# Altium PCB temp sense 2.0,uhh.PcbDoc (part 1 of 3)
Units mm, origin at the board's own origin, x right, y up, seen from the top; angles counter-clockwise.
Board outline 238.51 x 89.79 mm, 4 copper layers (Top Layer, Layer 1, Layer 2, Bottom Layer), stack 0.603 mm thick; 185 components, 160 nets, 943 pads, 253 vias.
Unrouted connection lines stored in the file: 15.
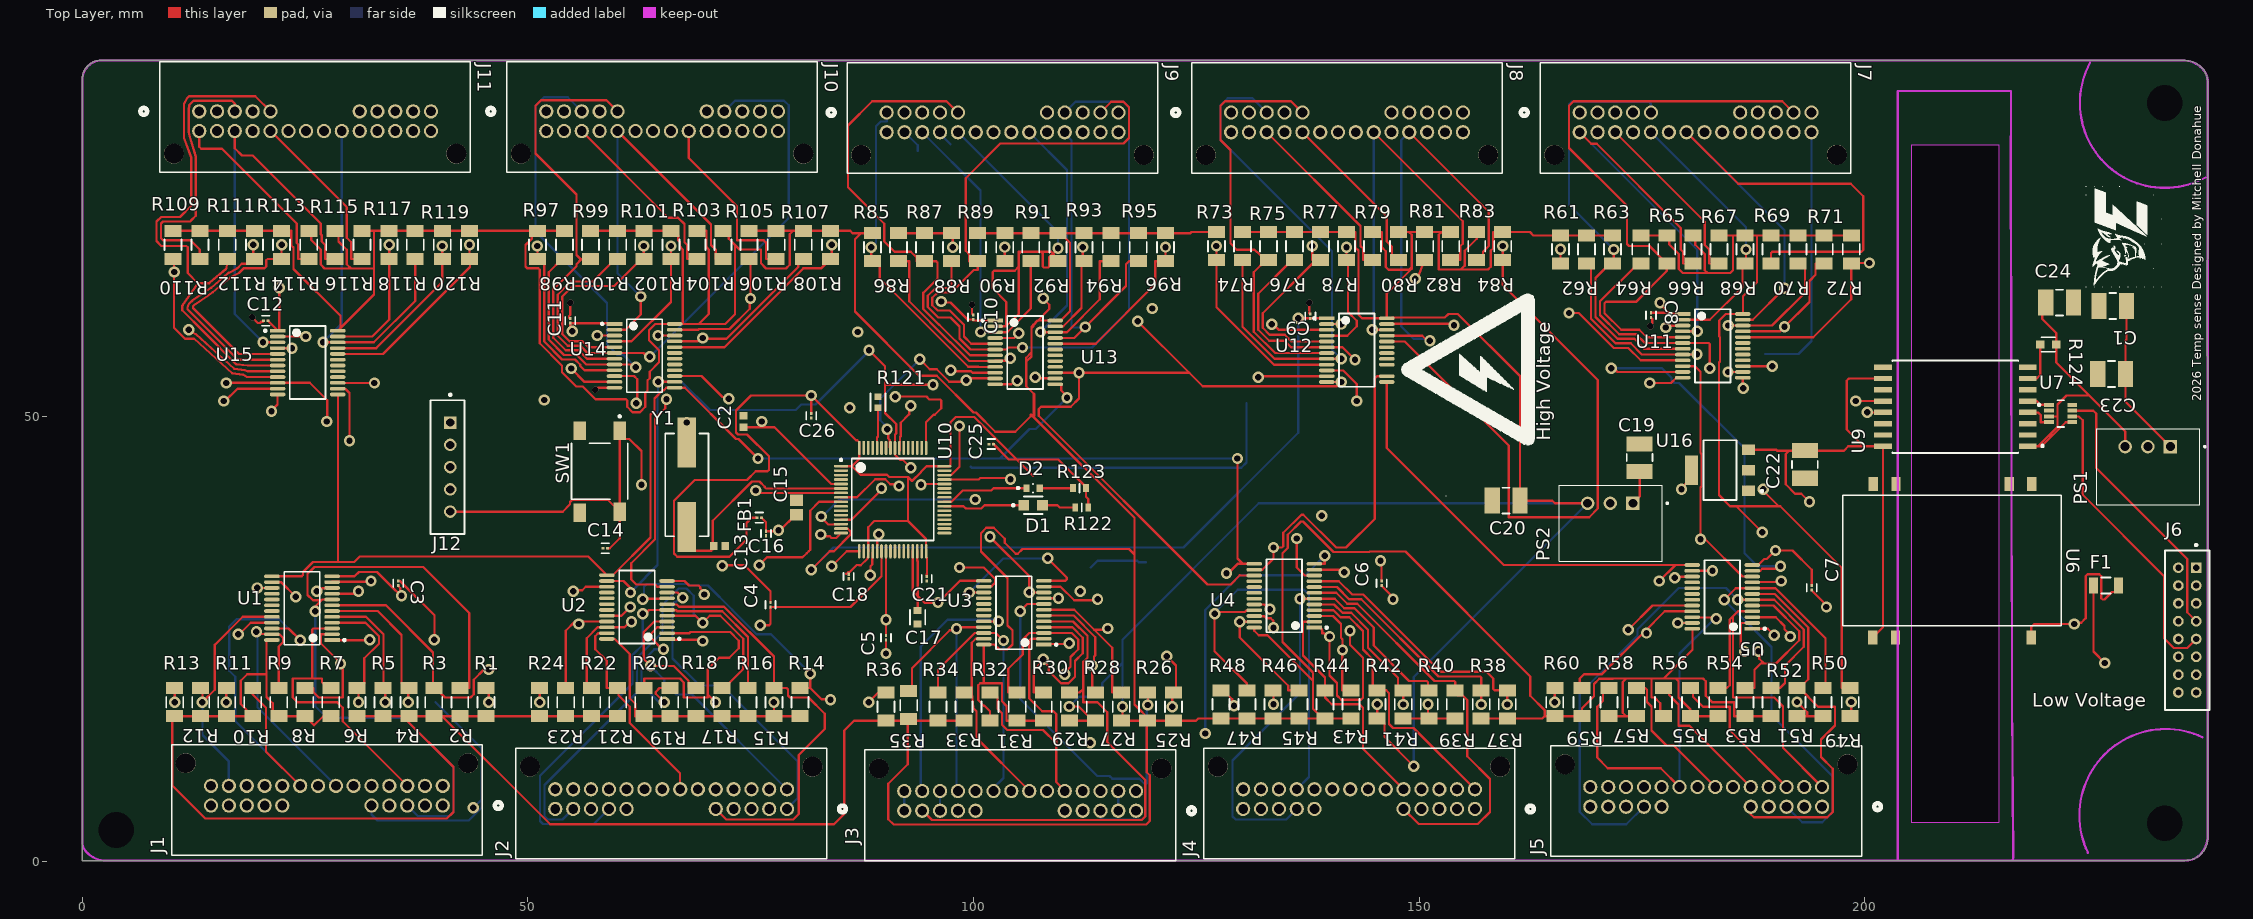
[diagram p0: Top Layer view]
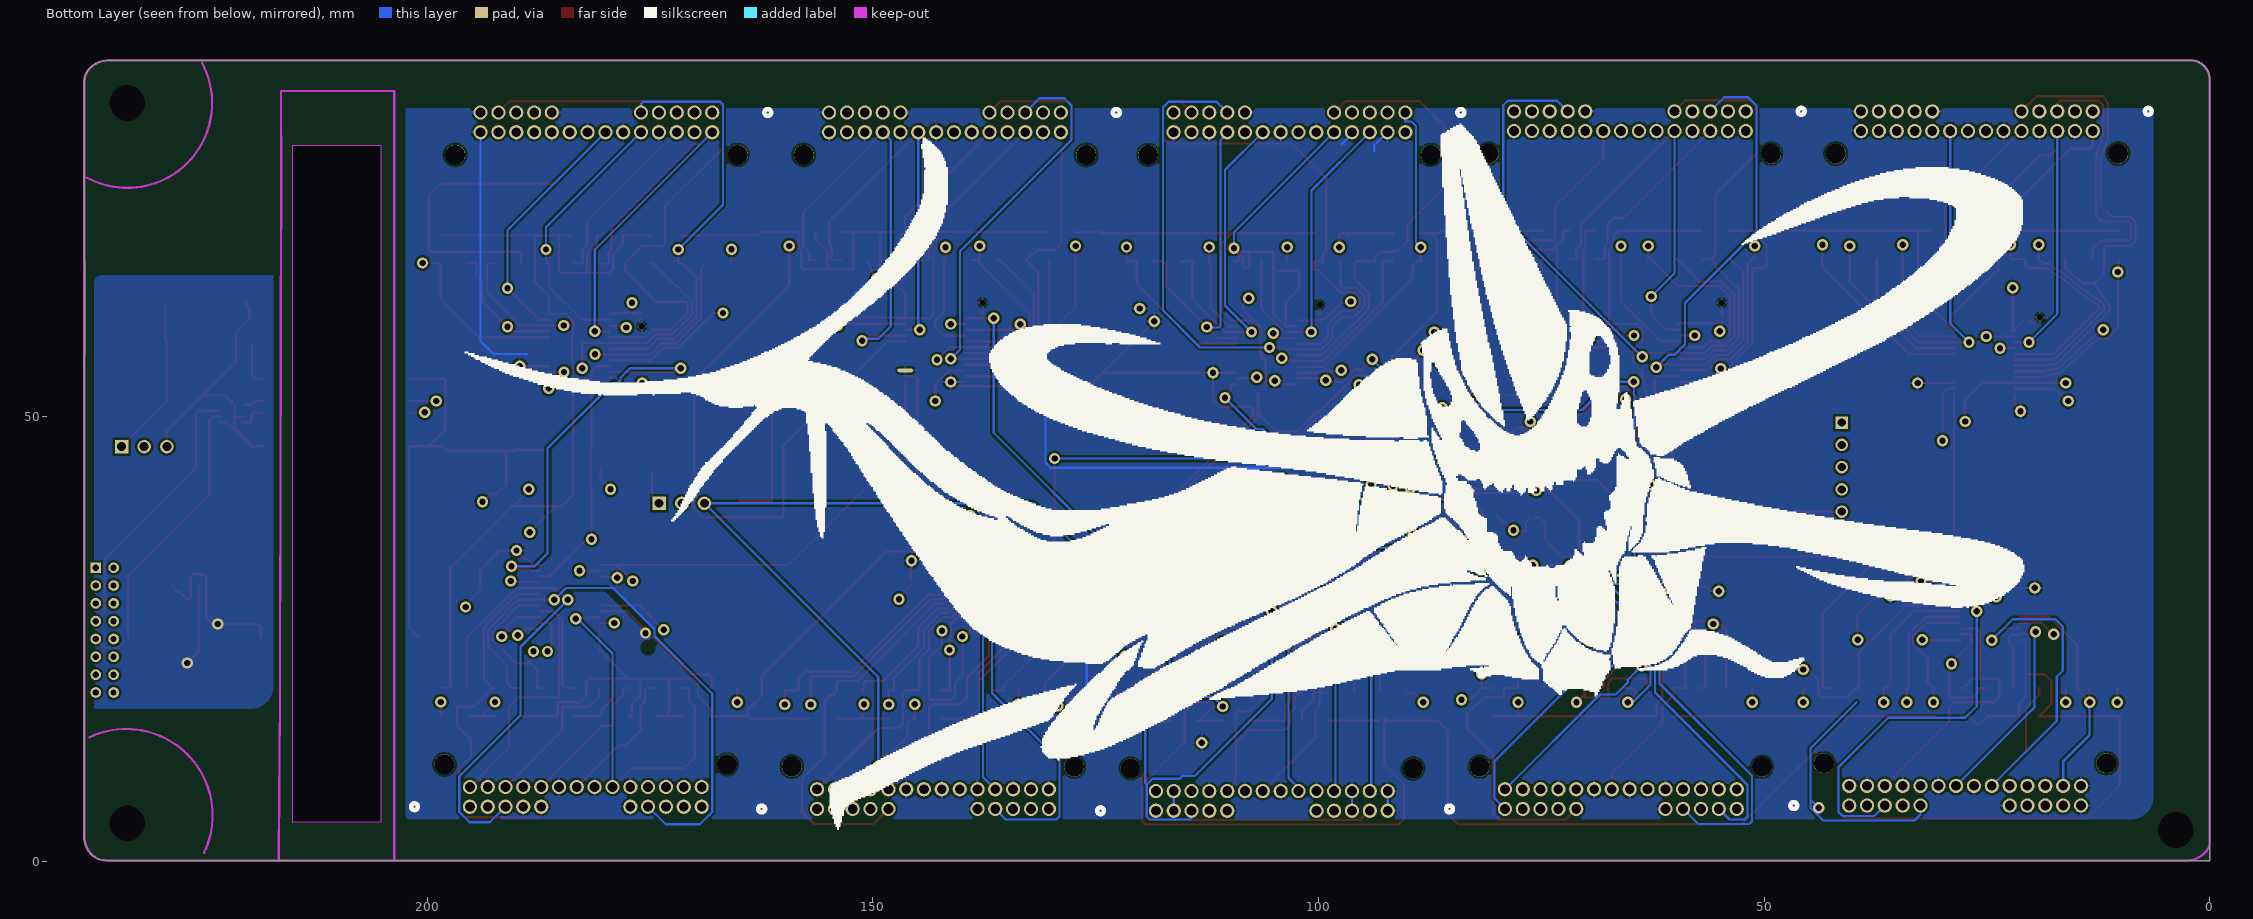
[diagram p1: Bottom Layer view, seen from below]
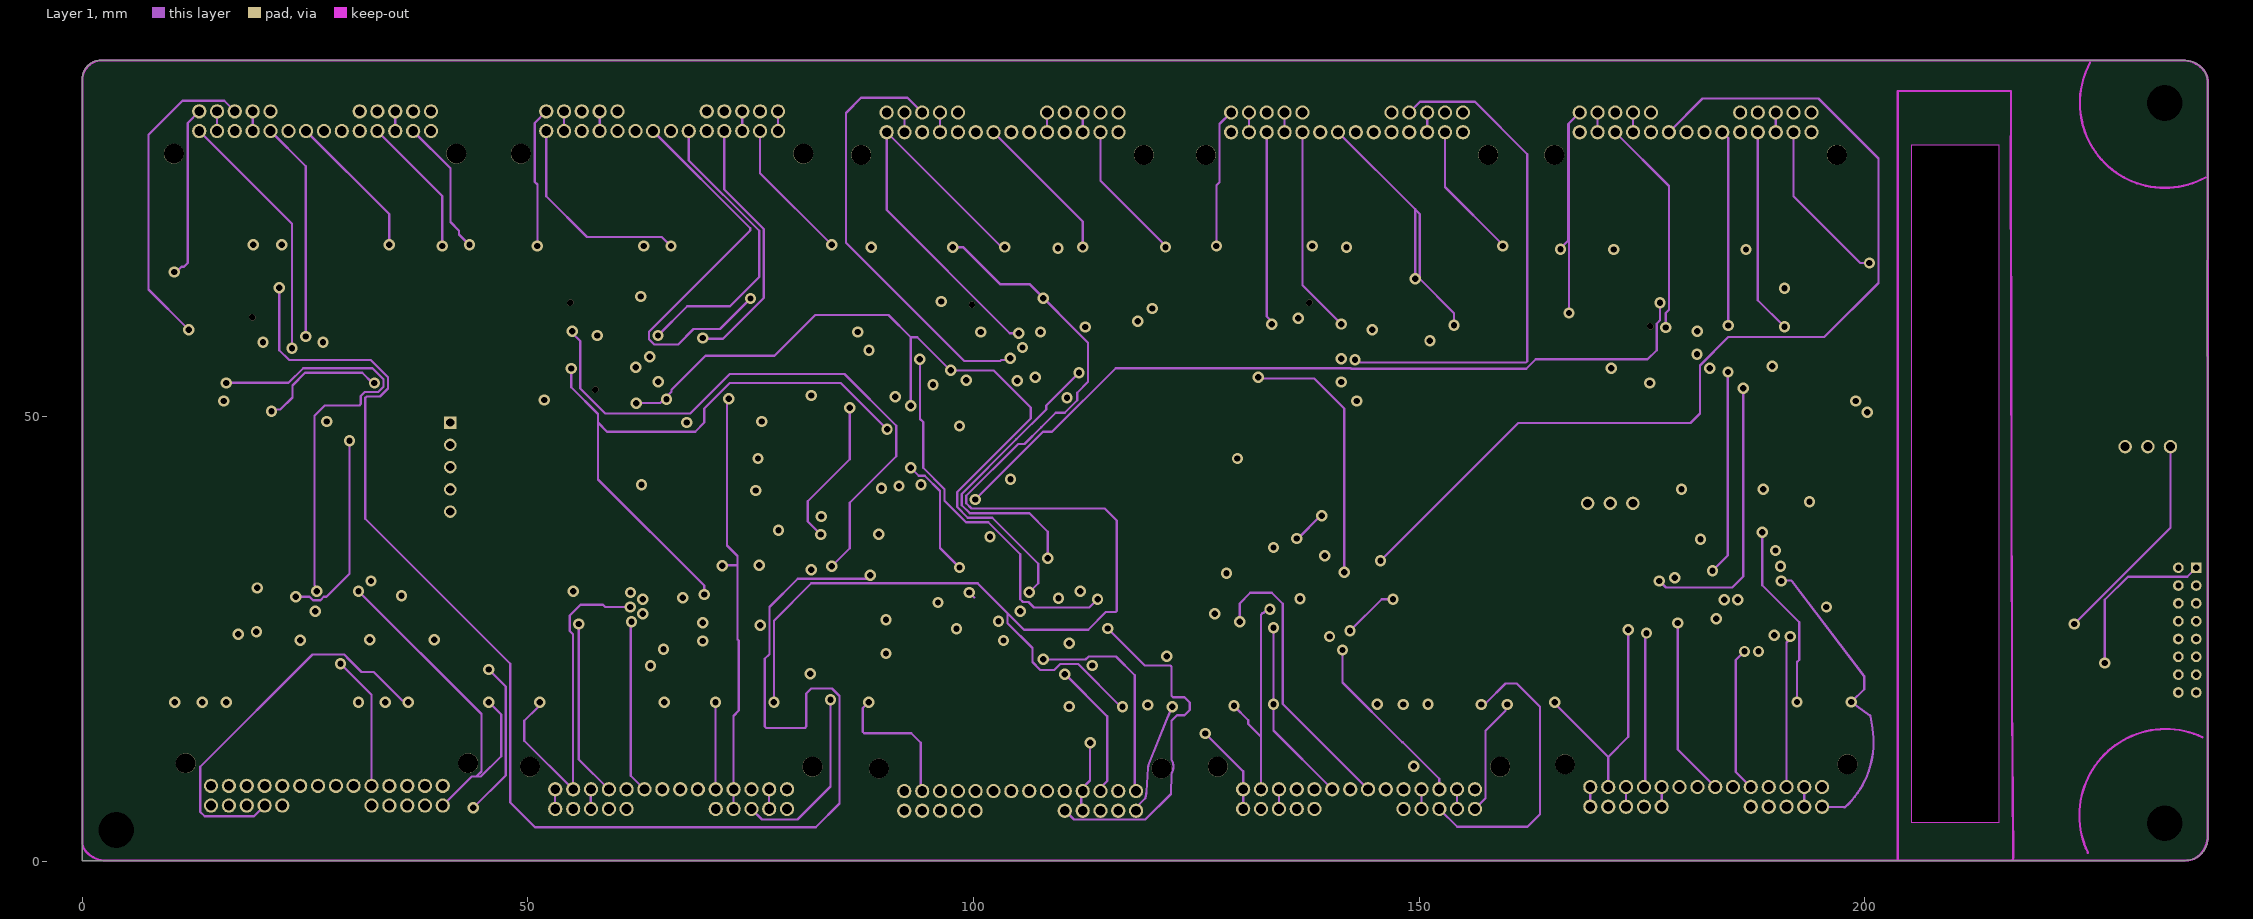
[diagram p2: Layer 1]
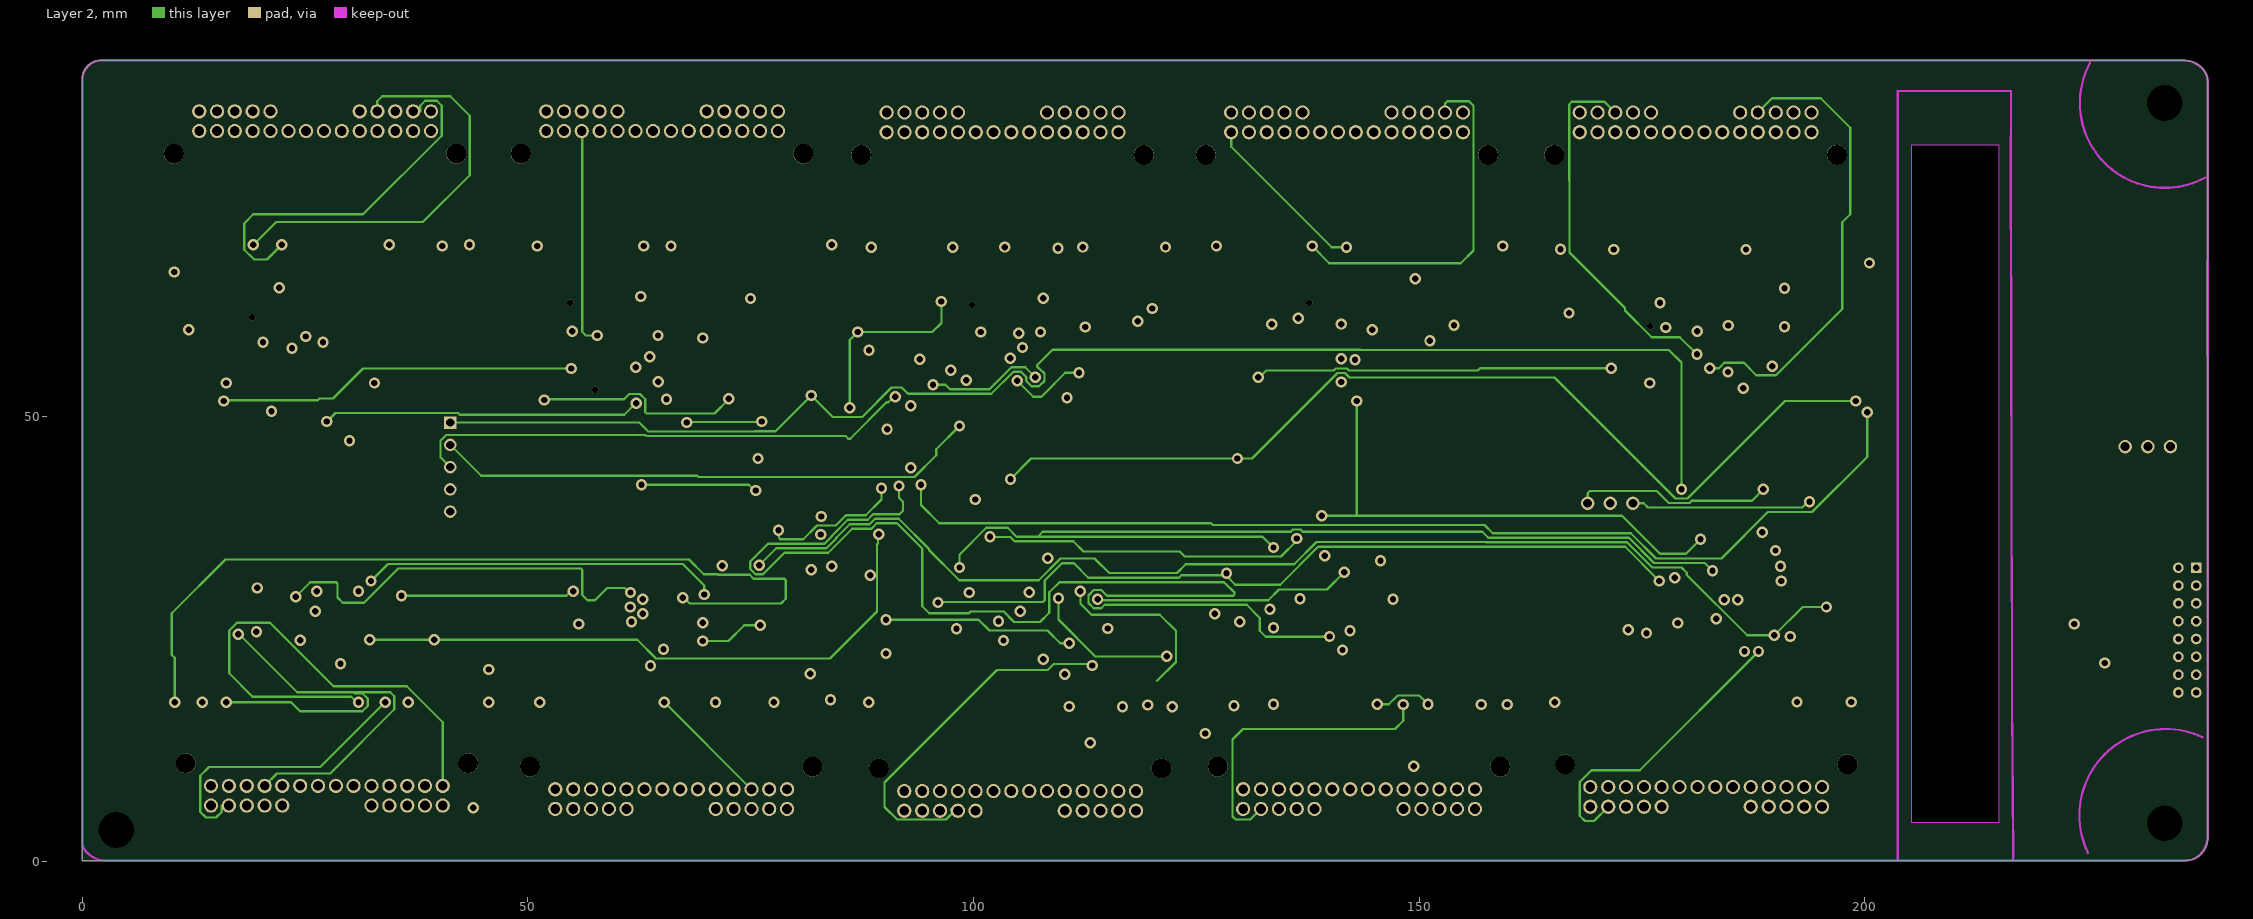
[diagram p3: Layer 2]
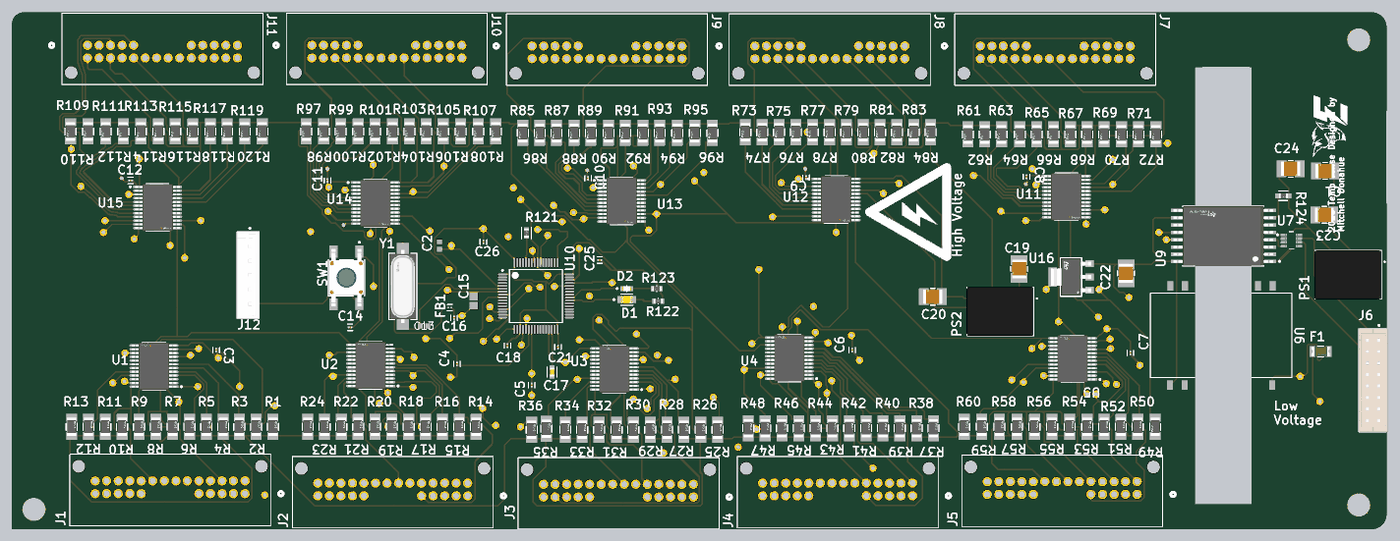
[diagram p6: 3D render of the assembled board from above, using the file's embedded part models]

## Layer stack, top to bottom
Top Solder: solder mask 0.0102, Solder Resist, Dk 3.5
Top Layer: signal copper 0.0356
Dielectric 2: prepreg 0.0711, PP-006, Dk 4.1
Layer 1: signal copper 0.035
Dielectric 1: dielectric 0.32, FR-4, Dk 4.8
Layer 2: signal copper 0.035
Dielectric 3: prepreg 0.0711, PP-006, Dk 4.1
Bottom Layer: signal copper 0.0356
Bottom Solder: solder mask 0.0102, Solder Resist, Dk 3.5

## Board outline
0,87.884 cw(c2.032,87.884) 2.032,89.916 235.966,89.916 cw(c235.966,87.376) 238.506,87.376 238.506,78.359 238.469,56.732 cw(c238.379,56.642) 238.506,56.642 238.506,2.667 cw(c235.966,2.667) 235.966,0.127 0,0.127
cut-out: 205.232,42.545 205.232,4.445 215.105,4.445 215.105,80.391 205.232,80.391 205.232,50.8

## Design rules (kind name [scope] priority, off if disabled: settings)
Clearance mcu_clearance [(InComponentClass('MCU') AND InComponent('U10'))] p1: gap=0.15 ignorepadtopadclearanceinfootprint=FALSE
Clearance [All] p2: gap=0.254 ignorepadtopadclearanceinfootprint=FALSE
PolygonConnect [All] p1: connectstyle=Relief reliefconductorwidth=0.254 reliefentries=4 polygonreliefangle="90 Angle" airgapwidth=0.254
RoutingVias [All] p1: holewidth=0.711 width=1.27 viastyle="Through Hole" minholewidth=0.711 minwidth=1.27 maxholewidth=0.711 maxwidth=1.27
SolderMaskExpansion [All] p1: expansion=0.102 istentingtop=FALSE
SupplyNets "Schematic Supply Nets_1" [InNet('GND')] p1: voltage=0.000
SupplyNets "Schematic Supply Nets" [InNet('GND')] p2: voltage=0.000
Width [All] p1: maxlimit=0.254 minlimit=0.254 preferedwidth=0.254
30 further rules are at their usual default settings.

## Classes and differential pairs
component class Power: C1 C22 C23 C24 F1 J6 PS1 R124 U6 U7 U9
component class "Mux side right": C8 C9 C10 C11 C12 J7 J8 J9 J10 J11 R61 R62 R63 R64 R65 R66 R67 R68 R69 R70 R71 R72 R73 R74 R75 R76 R77 R78 R79 R80 R81 R82 R83 R84 R85 R86 R87 R88 R89 R90 R91 R92 R93 R94 R95 R96 R97 R98 R99 R100 R101 R102 R103 R104 R105 R106 R107 R108 R109 R110 R111 R112 R113 R114 R115 R116 R117 R118 R119 R120 U11 U12 U13 U14 U15
component class "mux side left": C3 C4 C5 C6 C7 J1 J2 J3 J4 J5 R1 R2 R3 R4 R5 R6 R7 R8 R9 R10 R11 R12 R13 R14 R15 R16 R17 R18 R19 R20 R21 R22 R23 R24 R25 R26 R27 R28 R29 R30 R31 R32 R33 R34 R35 R36 R37 R38 R39 R40 R41 R42 R43 R44 R45 R46 R47 R48 R49 R50 R51 R52 R53 R54 R55 R56 R57 R58 R59 R60 U1 U2 U3 U4 U5
component class MCU: C2 C13 C14 C15 C16 C17 C18 C19 C20 C21 C25 C26 D1 D2 FB1 J12 PS2 R121 R122 R123 SW1 U10 U16 Y1

## Components (designator, comment, footprint, x,y, rotation, side; value= is the part's Value field where it differs from the comment)
C1 "1210ZC106KAT2A" FP-1210-L_3_3_0_4-W_2_5_0-IPC_A 227.838,62.357 r180 top
C2 "06035A300JAT2A" CAPC1608X90X35LL15T15 74.168,49.403 r90 top
C3 "GRM033R61A104KE15D" FP-GRM033-0_03-IPC_C#1 35.433,31.242 r270 top
C4 "GRM033R61A104KE15D" FP-GRM033-0_03-IPC_C#1 77.216,28.829 r90 top
C5 "GRM033R61A104KE15D" FP-GRM033-0_03-IPC_C#1 90.17,25.146 r270 top
C6 "GRM033R61A104KE15D" FP-GRM033-0_03-IPC_C#1 145.796,31.242 r90 top
C7 "GRM033R61A104KE15D" FP-GRM033-0_03-IPC_C#1 194.056,30.734 r90 top
C8 "GRM033R61A104KE15D" FP-GRM033-0_03-IPC_C#1 176.022,61.341 r270 top
C9 "GRM033R61A104KE15D" FP-GRM033-0_03-IPC_C#1 137.795,61.214 r90 top
C10 "GRM033R61A104KE15D" FP-GRM033-0_03-IPC_C#2 99.949,61.087 r90 top
C11 "GRM033R61A104KE15D" FP-GRM033-0_03-IPC_C#1 54.737,60.706 r90 top
C12 "GRM033R61A104KE15D" FP-GRM033-0_03-IPC_C#1 20.574,60.706 r180 top
C13 "06035A300JAT2A" CAPC1608X90X35LL15T15 71.501,35.433 r180 top
C14 "GRM033R61A104KE15D" FP-GRM033-0_03-IPC_C#1 58.674,35.179 r180 top
C15 "0805YD105MAT2A" CAPC2013X140X50NL20T25 80.137,39.751 r270 top
C16 "GRM033R61A104KE15D" FP-GRM033-0_03-IPC_C#1 76.708,36.83 r270 top
C17 "CC0603KPX5R7BB225" FP-CC0603-DA-MFG 93.726,27.432 r270 top value="2.2 uF"
C18 "GRM033R61A104KE15D" FP-GRM033-0_03-IPC_C#1 85.979,32.004 r270 top
C19 "1210ZC106KAT2A" FP-1210-L_3_3_0_4-W_2_5_0-IPC_A 174.752,45.339 r270 top
C20 "1210ZC106KAT2A" FP-1210-L_3_3_0_4-W_2_5_0-IPC_A 159.766,40.513 r180 top
C21 "RM033R61A104KE15D" FP-GRM033-0_03-IPC_C#1 94.742,31.75 r270 top
C22 "1210ZC106KAT2A" FP-1210-L_3_3_0_4-W_2_5_0-IPC_A 193.294,44.577 r90 top
C23 "1210ZC106KAT2A" FP-1210-L_3_3_0_4-W_2_5_0-IPC_A 227.711,54.737 r180 top
C24 "1210ZC106KAT2A" FP-1210-L_3_3_0_4-W_2_5_0-IPC_A 221.869,62.738 r0 top
C25 "GRM033R61A104KE15D" FP-GRM033-0_03-IPC_C#1 101.981,46.863 r180 top
C26 "GRM033R61A104KE15D" FP-GRM033-0_03-IPC_C#1 81.788,50.038 r270 top
D1 "APHCM2012SYCK-F01" FP-APHCM2012SYCK-F01-MFG 106.68,40.005 r0 top
D2 "APHD1608LZGCK" FP-APHD1608LZGCK-MFG 106.68,41.91 r0 top
F1 "1206L075/16WR" FP-1206L-MFG 227.076,30.988 r0 top value=0.09-0.29Ω
FB1 "BLM03BB750SZ1D" FP-BLM03-0_03-d0_3-IPC_C 75.946,38.608 r0 top
J1 "348250240" CONN_SD-34825-001_24_MOL 40.437,6.299 r180 top
J2 "348250240" CONN_SD-34825-001_24_MOL 79.07,5.918 r180 top
J3 "348250240" CONN_SD-34825-001_24_MOL 118.237,5.715 r180 top
J4 "348250240" CONN_SD-34825-001_24_MOL 156.261,5.918 r180 top
J5 "348250240" CONN_SD-34825-001_24_MOL 195.224,6.172 r180 top
J6 "B16B-PHDSS(LF)(SN)" FP-B16B-PHDSS_LF_SN-MFG 236.204,25.987 r90 top
J7 "348250240" CONN_SD-34825-001_24_MOL 168.021,84.074 r0 top
J8 "348250240" CONN_SD-34825-001_24_MOL 128.905,84.074 r0 top
J9 "348250240" CONN_SD-34825-001_24_MOL 90.246,84.074 r0 top
J10 "348250240" CONN_SD-34825-001_24_MOL 52.045,84.201 r0 top
J11 "348250240" CONN_SD-34825-001_24_MOL 13.106,84.201 r0 top
J12 "B5B-EH-A(LF)(SN)" FP-B5B-EH-A_LF_SN-MFG 40.975,44.283 r270 top
PS1 "R-78E3.3-0.5" CONV_R-78E3.3-0.5 231.775,44.323 r180 top
PS2 "R-78E3.3-0.5" CONV_R-78E3.3-0.5 171.45,37.973 r180 top
R1 "RN73R2BTTD3001B25" FP-RN73R2B-IPC_A 45.275,17.907 r90 top
R2 "RN73R2BTTD3001B25" FP-RN73R2B-IPC_A 42.354,17.907 r90 top
R3 "RN73R2BTTD3001B25" FP-RN73R2B-IPC_A 39.433,17.907 r90 top
R4 "RN73R2BTTD3001B25" FP-RN73R2B-IPC_A 36.639,17.907 r90 top
R5 "RN73R2BTTD3001B25" FP-RN73R2B-IPC_A 33.718,17.907 r90 top
R6 "RN73R2BTTD3001B25" FP-RN73R2B-IPC_A 30.797,17.907 r90 top
R7 "RN73R2BTTD3001B25" FP-RN73R2B-IPC_A 27.876,17.907 r90 top
R8 "RN73R2BTTD3001B25" FP-RN73R2B-IPC_A 24.955,17.907 r90 top
R9 "RN73R2BTTD3001B25" FP-RN73R2B-IPC_A 22.034,17.907 r90 top
R10 "RN73R2BTTD3001B25" FP-RN73R2B-IPC_A 19.113,17.907 r90 top
R11 "RN73R2BTTD3001B25" FP-RN73R2B-IPC_A 16.192,17.907 r90 top
R12 "RN73R2BTTD3001B25" FP-RN73R2B-IPC_A 13.271,17.907 r90 top
R13 "RN73R2BTTD3001B25" FP-RN73R2B-IPC_A 10.35,17.907 r90 top
R14 "RN73R2BTTD3001B25" FP-RN73R2B-IPC_A 80.518,17.907 r90 top
R15 "RN73R2BTTD3001B25" FP-RN73R2B-IPC_A 77.597,17.907 r90 top
R16 "RN73R2BTTD3001B25" FP-RN73R2B-IPC_A 74.676,17.907 r90 top
R17 "RN73R2BTTD3001B25" FP-RN73R2B-IPC_A 71.755,17.907 r90 top
R18 "RN73R2BTTD3001B25" FP-RN73R2B-IPC_A 68.834,17.907 r90 top
R19 "RN73R2BTTD3001B25" FP-RN73R2B-IPC_A 65.913,17.907 r90 top
R20 "RN73R2BTTD3001B25" FP-RN73R2B-IPC_A 62.992,17.907 r90 top
R21 "RN73R2BTTD3001B25" FP-RN73R2B-IPC_A 60.071,17.907 r90 top
R22 "RN73R2BTTD3001B25" FP-RN73R2B-IPC_A 57.15,17.907 r90 top
R23 "RN73R2BTTD3001B25" FP-RN73R2B-IPC_A 54.229,17.907 r90 top
R24 "RN73R2BTTD3001B25" FP-RN73R2B-IPC_A 51.308,17.907 r90 top
R25 "RN73R2BTTD3001B25" FP-RN73R2B-IPC_A 122.428,17.399 r90 top
R26 "RN73R2BTTD3001B25" FP-RN73R2B-IPC_A 119.507,17.399 r90 top
R27 "RN73R2BTTD3001B25" FP-RN73R2B-IPC_A 116.586,17.399 r90 top
R28 "RN73R2BTTD3001B25" FP-RN73R2B-IPC_A 113.665,17.399 r90 top
R29 "RN73R2BTTD3001B25" FP-RN73R2B-IPC_A 110.744,17.399 r90 top
R30 "RN73R2BTTD3001B25" FP-RN73R2B-IPC_A 107.823,17.399 r90 top
R31 "RN73R2BTTD3001B25" FP-RN73R2B-IPC_A 104.902,17.399 r90 top
R32 "RN73R2BTTD3001B25" FP-RN73R2B-IPC_A 101.854,17.399 r90 top
R33 "RN73R2BTTD3001B25" FP-RN73R2B-IPC_A 98.933,17.399 r90 top
R34 "RN73R2BTTD3001B25" FP-RN73R2B-IPC_A 96.012,17.399 r90 top
R35 "RN73R2BTTD3001B25" FP-RN73R2B-IPC_A 92.723,17.577 r90 top
R36 "RN73R2BTTD3001B25" FP-RN73R2B-IPC_A 90.17,17.399 r90 top
R37 "RN73R2BTTD3001B25" FP-RN73R2B-IPC_A 159.893,17.653 r90 top
R38 "RN73R2BTTD3001B25" FP-RN73R2B-IPC_A 156.972,17.653 r90 top
R39 "RN73R2BTTD3001B25" FP-RN73R2B-IPC_A 154.051,17.653 r90 top
R40 "RN73R2BTTD3001B25" FP-RN73R2B-IPC_A 151.13,17.653 r90 top
R41 "RN73R2BTTD3001B25" FP-RN73R2B-IPC_A 148.209,17.653 r90 top
R42 "RN73R2BTTD3001B25" FP-RN73R2B-IPC_A 145.288,17.653 r90 top
R43 "RN73R2BTTD3001B25" FP-RN73R2B-IPC_A 142.367,17.653 r90 top
R44 "RN73R2BTTD3001B25" FP-RN73R2B-IPC_A 139.446,17.653 r90 top
R45 "RN73R2BTTD3001B25" FP-RN73R2B-IPC_A 136.525,17.653 r90 top
R46 "RN73R2BTTD3001B25" FP-RN73R2B-IPC_A 133.604,17.653 r90 top
R47 "RN73R2BTTD3001B25" FP-RN73R2B-IPC_A 130.683,17.653 r90 top
R48 "RN73R2BTTD3001B25" FP-RN73R2B-IPC_A 127.762,17.653 r90 top
R49 "RN73R2BTTD3001B25" FP-RN73R2B-IPC_A 198.374,17.907 r270 top
R50 "RN73R2BTTD3001B25" FP-RN73R2B-IPC_A 195.326,17.907 r90 top
R51 "RN73R2BTTD3001B25" FP-RN73R2B-IPC_A 192.405,17.907 r90 top
R52 "RN73R2BTTD3001B25" FP-RN73R2B-IPC_A 189.484,17.907 r90 top
R53 "RN73R2BTTD3001B25" FP-RN73R2B-IPC_A 186.563,17.907 r90 top
R54 "RN73R2BTTD3001B25" FP-RN73R2B-IPC_A 183.515,17.907 r90 top
R55 "RN73R2BTTD3001B25" FP-RN73R2B-IPC_A 180.467,17.907 r90 top
R56 "RN73R2BTTD3001B25" FP-RN73R2B-IPC_A 177.419,17.907 r90 top
R57 "RN73R2BTTD3001B25" FP-RN73R2B-IPC_A 174.371,17.907 r90 top
R58 "RN73R2BTTD3001B25" FP-RN73R2B-IPC_A 171.323,17.907 r90 top
R59 "RN73R2BTTD3001B25" FP-RN73R2B-IPC_A 168.275,17.907 r90 top
R60 "RN73R2BTTD3001B25" FP-RN73R2B-IPC_A 165.227,17.907 r90 top
R61 "RN73R2BTTD3001B25" FP-RN73R2B-IPC_A 165.862,68.707 r270 top
R62 "RN73R2BTTD3001B25" FP-RN73R2B-IPC_A 168.783,68.707 r270 top
R63 "RN73R2BTTD3001B25" FP-RN73R2B-IPC_A 171.704,68.707 r270 top
R64 "RN73R2BTTD3001B25" FP-RN73R2B-IPC_A 174.879,68.707 r270 top
R65 "RN73R2BTTD3001B25" FP-RN73R2B-IPC_A 177.8,68.707 r270 top
R66 "RN73R2BTTD3001B25" FP-RN73R2B-IPC_A 180.721,68.707 r270 top
R67 "RN73R2BTTD3001B25" FP-RN73R2B-IPC_A 183.642,68.707 r270 top
R68 "RN73R2BTTD3001B25" FP-RN73R2B-IPC_A 186.563,68.707 r270 top
R69 "RN73R2BTTD3001B25" FP-RN73R2B-IPC_A 189.484,68.707 r270 top
R70 "RN73R2BTTD3001B25" FP-RN73R2B-IPC_A 192.532,68.707 r270 top
R71 "RN73R2BTTD3001B25" FP-RN73R2B-IPC_A 195.453,68.707 r270 top
R72 "RN73R2BTTD3001B25" FP-RN73R2B-IPC_A 198.501,68.707 r270 top
R73 "RN73R2BTTD3001B25" FP-RN73R2B-IPC_A 127.254,69.088 r270 top
R74 "RN73R2BTTD3001B25" FP-RN73R2B-IPC_A 130.175,69.088 r270 top
R75 "RN73R2BTTD3001B25" FP-RN73R2B-IPC_A 133.096,69.088 r270 top
R76 "RN73R2BTTD3001B25" FP-RN73R2B-IPC_A 136.017,69.088 r270 top
R77 "RN73R2BTTD3001B25" FP-RN73R2B-IPC_A 138.938,69.088 r270 top
R78 "RN73R2BTTD3001B25" FP-RN73R2B-IPC_A 141.859,69.088 r270 top
R79 "RN73R2BTTD3001B25" FP-RN73R2B-IPC_A 144.78,69.088 r270 top
R80 "RN73R2BTTD3001B25" FP-RN73R2B-IPC_A 147.701,69.088 r270 top
R81 "RN73R2BTTD3001B25" FP-RN73R2B-IPC_A 150.622,69.088 r270 top
R82 "RN73R2BTTD3001B25" FP-RN73R2B-IPC_A 153.543,69.088 r270 top
R83 "RN73R2BTTD3001B25" FP-RN73R2B-IPC_A 156.464,69.088 r270 top
R84 "RN73R2BTTD3001B25" FP-RN73R2B-IPC_A 159.385,69.088 r270 top
R85 "RN73R2BTTD3001B25" FP-RN73R2B-IPC_A 88.646,68.961 r270 top
R86 "RN73R2BTTD3001B25" FP-RN73R2B-IPC_A 91.567,68.961 r270 top
R87 "RN73R2BTTD3001B25" FP-RN73R2B-IPC_A 94.488,68.961 r270 top
R88 "RN73R2BTTD3001B25" FP-RN73R2B-IPC_A 97.536,68.961 r270 top
R89 "RN73R2BTTD3001B25" FP-RN73R2B-IPC_A 100.457,68.961 r270 top
R90 "RN73R2BTTD3001B25" FP-RN73R2B-IPC_A 103.505,68.961 r270 top
R91 "RN73R2BTTD3001B25" FP-RN73R2B-IPC_A 106.426,68.961 r270 top
R92 "RN73R2BTTD3001B25" FP-RN73R2B-IPC_A 109.474,68.961 r270 top
R93 "RN73R2BTTD3001B25" FP-RN73R2B-IPC_A 112.395,68.961 r270 top
R94 "RN73R2BTTD3001B25" FP-RN73R2B-IPC_A 115.443,68.961 r270 top
R95 "RN73R2BTTD3001B25" FP-RN73R2B-IPC_A 118.491,68.961 r270 top
R96 "RN73R2BTTD3001B25" FP-RN73R2B-IPC_A 121.539,68.961 r270 top
R97 "RN73R2BTTD3001B25" FP-RN73R2B-IPC_A 51.054,69.215 r270 top
R98 "RN73R2BTTD3001B25" FP-RN73R2B-IPC_A 54.102,69.215 r270 top
R99 "RN73R2BTTD3001B25" FP-RN73R2B-IPC_A 57.023,69.215 r270 top
R100 "RN73R2BTTD3001B25" FP-RN73R2B-IPC_A 60.071,69.215 r270 top
R101 "RN73R2BTTD3001B25" FP-RN73R2B-IPC_A 62.992,69.215 r270 top
R102 "RN73R2BTTD3001B25" FP-RN73R2B-IPC_A 66.04,69.215 r270 top
R103 "RN73R2BTTD3001B25" FP-RN73R2B-IPC_A 68.961,69.215 r270 top
R104 "RN73R2BTTD3001B25" FP-RN73R2B-IPC_A 71.882,69.215 r270 top
R105 "RN73R2BTTD3001B25" FP-RN73R2B-IPC_A 74.803,69.215 r270 top
R106 "RN73R2BTTD3001B25" FP-RN73R2B-IPC_A 77.851,69.215 r270 top
R107 "RN73R2BTTD3001B25" FP-RN73R2B-IPC_A 80.899,69.215 r270 top
R108 "RN73R2BTTD3001B25" FP-RN73R2B-IPC_A 83.947,69.215 r270 top
R109 "RN73R2BTTD3001B25" FP-RN73R2B-IPC_A 10.16,69.215 r270 top
R110 "RN73R2BTTD3001B25" FP-RN73R2B-IPC_A 13.208,69.215 r270 top
R111 "RN73R2BTTD3001B25" FP-RN73R2B-IPC_A 16.256,69.215 r270 top
R112 "RN73R2BTTD3001B25" FP-RN73R2B-IPC_A 19.304,69.215 r270 top
R113 "RN73R2BTTD3001B25" FP-RN73R2B-IPC_A 22.352,69.215 r270 top
R114 "RN73R2BTTD3001B25" FP-RN73R2B-IPC_A 25.4,69.215 r270 top
R115 "RN73R2BTTD3001B25" FP-RN73R2B-IPC_A 28.321,69.215 r270 top
R116 "RN73R2BTTD3001B25" FP-RN73R2B-IPC_A 31.369,69.215 r270 top
R117 "RN73R2BTTD3001B25" FP-RN73R2B-IPC_A 34.417,69.215 r270 top
R118 "RN73R2BTTD3001B25" FP-RN73R2B-IPC_A 37.338,69.215 r270 top
R119 "RN73R2BTTD3001B25" FP-RN73R2B-IPC_A 40.386,69.215 r270 top
R120 "RN73R2BTTD3001B25" FP-RN73R2B-IPC_A 43.434,69.215 r270 top
R121 "RQ73C1J100KBTD" FP-RQ731J-IPC_C 89.281,51.562 r270 top value=100KΩ
R122 "ERJH3GJ331V" FP-ERJH3G-MFG 112.141,39.751 r180 top
R123 "ERJH3GJ331V" FP-ERJH3G-MFG 111.887,41.91 r180 top
R124 "RN73C1J10KB" FP-RN731J-MFG 220.599,58.039 r0 top value=10KΩ
SW1 "2-1977223-2" FP-2-1977223-2-MFG 58.039,43.815 r0 top
U1 "CD74HC4067SM96" FP-DB0024A-IPC_C#1 24.638,28.448 r180 top
U2 "CD74HC4067SM96" FP-DB0024A-IPC_C#2 62.23,28.575 r180 top
U3 "CD74HC4067SM96" FP-DB0024A-IPC_C#1 104.521,27.94 r180 top
U4 "CD74HC4067SM96" FP-DB0024A-IPC_C#1 134.874,29.845 r180 top
U5 "CD74HC4067SM96" FP-DB0024A-IPC_C#1 184.023,29.718 r180 top
U6 "TIM 3.5-0911SM" "TIM 3.5SM SINGLE_TRP" 209.804,33.782 r270 top
U7 "TCAN330GDCNR" FP-DCN0008A-MFG 221.996,50.292 r0 top
U9 "ISO7842FDWW" FP-DWW0016A-MFG 210.182,51.054 r180 top
U10 "STM32F446RET6" STM-LQFP64_L 90.926,40.634 r0 top
U11 "CD74HC4067SM96" FP-DB0024A-IPC_C#1 182.953,57.886 r0 top
U12 "CD74HC4067SM96" FP-DB0024A-IPC_C#3 143.002,57.404 r0 top
U13 "CD74HC4067SM96" FP-DB0024A-IPC_C#1 105.791,57.15 r0 top
U14 "CD74HC4067SM96" FP-DB0024A-IPC_C#1 63.079,56.769 r0 top
U15 "CD74HC4067SM96" FP-DB0024A-IPC_C#1 25.273,56.007 r0 top
U16 "LD1117S33CTR" FP-SOT-223-0046067_14-MFG 183.769,43.942 r180 top
Y1 "ABLS-8.000MHZ-B2-T" FP-ABLS-MFG 67.818,42.291 r90 top

## Footprints (in the part's own frame and the unit in brackets; to place one, negate y for a bottom-side part, rotate by r counter-clockwise, add the part's x,y. Pads: shape width x height; smd on the part's side, far side on the other; paste and mask are expansions set on the pad)
CAPC1608X90X35LL15T15 [mm] "Chip Capacitor, 2-Leads, Body 1.60x0.81mm, IPC High Density"
  rect 0.85x0.9 smd: 1(-0.65,0) 2(0.65,0)
  body extent -0.88,-0.48 0.87,0.48, height 0.9
CAPC2013X140X50NL20T25 [mm] "Chip Capacitor, 2-Leads, Body 2.00x1.25mm, IPC Medium Density"
  rect 1.3x1.45 smd: 1(-0.8,0) 2(0.8,0)
  body extent -1.1,-0.72 1.1,0.72, height 1.4
CONN_SD-34825-001_24_MOL [mil]
  round 63 hole 43: 1(0,0) 2(79,0) 3(157,0) 4(236,0) 5(315,0) 6(709,0) 7(787,0) 8(866,0) 9(945,0) 10(1024,0) 11(0,-87) 12(79,-87) 13(157,-87) 14(236,-87) 15(315,-87) 16(394,-87) 17(472,-87) 18(551,-87) 19(630,-87) 20(709,-87) 21(787,-87) 22(866,-87) 23(945,-87) 24(1024,-87)
  round 88 hole 88 unplated: ""(-112,-187) ""(1136,-187)
  silkscreen extent -260,-269 1198,220
CONV_R-78E3.3-0.5 [mm]
  rect 1.508x1.508 / inner round 1.508 / far side rect 1.508x1.508 hole 1: 1(-2.54,-2.25)
  round 1.508 hole 1: 2(0,-2.25) 3(2.54,-2.25)
  silkscreen extent -6.5,-4.25 5.75,4.25, body extent -5.8,-4.26 5.8,4.25, height 9.9
FP-2-1977223-2-MFG [mm]
  rect 1.4x2.1 smd paste+0 mask+0: 1(2.25,4.55) 2(2.25,-4.55) 3(-2.25,4.55) 4(-2.25,-4.65)
  silkscreen extent -3.15,-3.15 3.15,6.27, body extent -3.25,-5.8 3.25,5.7, height 0.25
FP-1206L-MFG [mm]
  rect 1x1.8 smd paste+0 mask+0: 1(-1.4,0) 2(1.4,0)
  silkscreen extent -0.53,-0.9 0.53,0.9, body extent -2,-1 2,1, height 0.25
FP-1210-L_3_3_0_4-W_2_5_0-IPC_A [mm]
  rect 1.703x2.904 smd paste+0 mask+0: 1(-1.55,0) 2(1.55,0)
  silkscreen extent -0.4,-1.45 0.4,1.45, body extent -2.9,-1.95 2.9,1.95, height 0.25
FP-ABLS-MFG [mm]
  rect 5.6x2.1 smd paste+0 mask+0: 1(-4.75,0) 2(4.75,0)
  silkscreen extent -5.77,-2.42 5.77,2.42, body extent -7.65,-2.52 7.65,2.52, height 0.25
FP-APHCM2012SYCK-F01-MFG [mm]
  rect 1.2x1.2 smd paste+0 mask+0: 1(-1.05,0) 2(1.05,0)
  silkscreen extent -2.35,-0.98 1.05,0.98, body extent -1.75,-0.77 1.75,0.77, height 0.25
FP-APHD1608LZGCK-MFG [mm]
  rect 0.7x0.8 smd paste+0 mask+0: 1(-0.75,0) 2(0.75,0)
  silkscreen extent -1.8,-0.47 0.02,0.47, body extent -1.2,-0.58 1.2,0.58, height 0.25
FP-B5B-EH-A_LF_SN-MFG [mm]
  rect 1.4x1.4 hole 0.9 paste-2539.97 mask+0: 1(-5,0.3)
  round 1.4 hole 0.9 paste-2539.97 mask+0: 2(-2.5,0.3) 3(0,0.3) 4(2.5,0.3) 5(5,0.3)
  silkscreen extent -8.22,-1.9 7.5,1.9, body extent -7.6,-2 7.6,2, height 0.25
FP-B16B-PHDSS_LF_SN-MFG [mm]
  rect 1.2x1.2 hole 0.7 paste-2539.97 mask+0: 1(7,-1)
  round 1.2 hole 0.7 paste-2539.97 mask+0: 2(7,1) 3(5,-1) 4(5,1) 5(3,-1) 6(3,1) 7(1,-1) 8(1,1) 9(-1,-1) 10(-1,1) 11(-3,-1) 12(-3,1) 13(-5,-1) 14(-5,1) 15(-7,-1) 16(-7,1)
  silkscreen extent -8.95,-2.5 9.67,2.5, body extent -9.05,-2.6 9.05,2.6, height 0.25
FP-BLM03-0_03-d0_3-IPC_C [mm]
  rect 0.354x0.263 smd paste+0 mask+0: 1(-0.254,0) 2(0.254,0)
  silkscreen extent -0.43,-0.56 0.43,0.56
FP-CC0603-DA-MFG [mm]
  rect 0.8x0.9 smd paste+0 mask+0: 1(-0.75,0) 2(0.75,0)
  silkscreen extent -0.85,-0.85 0.85,0.85, body extent -1.35,-0.75 1.35,0.75, height 0.25
FP-DB0024A-IPC_C#1 [mm]
  rect 1.753x0.415 smd paste+0 mask+0: 1(-3.375,3.575)
  rrect100% 1.753x0.415 smd paste+0 mask+0: 2(-3.375,2.925) 3(-3.375,2.275) 4(-3.375,1.625) 5(-3.375,0.975) 6(-3.375,0.325) 7(-3.375,-0.325) 8(-3.375,-0.975) 9(-3.375,-1.625) 10(-3.375,-2.275) 11(-3.375,-2.925) 12(-3.375,-3.575) 13(3.375,-3.575) 14(3.375,-2.925) 15(3.375,-2.275) 16(3.375,-1.625) 17(3.375,-0.975) 18(3.375,-0.325) 19(3.375,0.325) 20(3.375,0.975) 21(3.375,1.625) 22(3.375,2.275) 23(3.375,2.925) 24(3.375,3.575)
  silkscreen extent -4.88,-4.1 2,4.1, body extent -4.35,-4.2 4.35,4.2, height 0.25
FP-DB0024A-IPC_C#2 [mm]
  rect 1.753x0.415 smd paste+0 mask+0: 1(-3.375,3.575)
  rrect100% 1.753x0.415 smd paste+0 mask+0: 2(-3.375,2.925) 3(-3.375,2.275) 4(-3.375,1.625) 5(-3.375,0.975) 6(-3.375,0.325) 7(-3.375,-0.325) 8(-3.375,-0.975) 9(-3.375,-1.625) 10(-3.375,-2.275) 11(-3.375,-2.925) 13(3.375,-3.575) 14(3.375,-2.925) 15(3.375,-2.275) 16(3.375,-1.625) 17(3.375,-0.975) 18(3.375,-0.325) 19(3.375,0.325) 20(3.375,0.975) 21(3.375,1.625) 22(3.375,2.275) 23(3.375,2.925) 24(3.375,3.575)
  rrect100% 1.753x0.415 smd far side paste+0 mask+0: 12(-3.375,-3.575)
  silkscreen extent -4.88,-4.1 2,4.1, body extent -4.35,-4.2 4.35,4.2, height 0.25
FP-DB0024A-IPC_C#3 [mm]
  rect 1.753x0.415 smd paste+0 mask+0: 1(-3.375,3.575)
  rrect100% 1.753x0.415 smd paste+0 mask+0: 2(-3.375,2.925) 3(-3.375,2.275) 4(-3.375,1.625) 5(-3.375,0.975) 6(-3.375,0.325) 7(-3.375,-0.325) 8(-3.375,-0.975) 9(-3.375,-1.625) 10(-3.375,-2.275) 11(-3.375,-2.925) 12(-3.375,-3.575) 13(3.375,-3.575) 14(3.375,-2.925) 16(3.375,-1.625) 17(3.375,-0.975) 18(3.375,-0.325) 19(3.375,0.325) 20(3.375,0.975) 21(3.375,1.625) 22(3.375,2.275) 23(3.375,2.925) 24(3.375,3.575)
  rrect100% 1.753x0.415 smd far side paste+0 mask+0: 15(3.375,-2.275)
  silkscreen extent -4.88,-4.1 2,4.1, body extent -4.35,-4.2 4.35,4.2, height 0.25
FP-DCN0008A-MFG [mm]
  rect 1.1x0.45 smd paste+0 mask+0: 1(-1.3,0.975) 2(-1.3,0.325) 3(-1.3,-0.325) 4(-1.3,-0.975) 5(1.3,-0.975) 6(1.3,-0.325) 7(1.3,0.325) 8(1.3,0.975)
  silkscreen extent -2.55,-1.5 0.38,1.5, body extent -1.95,-1.85 1.95,1.85, height 0.25
FP-DWW0016A-MFG [mm]
  rect 2x0.6 smd paste+0 mask+0: 1(-8.125,4.445) 2(-8.125,3.175) 3(-8.125,1.905) 4(-8.125,0.635) 5(-8.125,-0.635) 6(-8.125,-1.905) 7(-8.125,-3.175) 8(-8.125,-4.445) 9(8.125,-4.445) 10(8.125,-3.175) 11(8.125,-1.905) 12(8.125,-0.635) 13(8.125,0.635) 14(8.125,1.905) 15(8.125,3.175) 16(8.125,4.445)
  silkscreen extent -9.9,-5.2 7.05,5.2, body extent -9.23,-5.45 9.23,5.45, height 0.25
FP-ERJH3G-MFG [mm]
  rect 0.65x0.9 smd paste+0 mask+0: 1(-0.725,0) 2(0.725,0)
  silkscreen extent 0,-0.47 0,0.47, body extent -1.15,-0.58 1.15,0.58, height 0.25
FP-GRM033-0_03-IPC_C#1 [mm]
  rect 0.354x0.263 smd paste+0 mask+0: 1(-0.254,0) 2(0.254,0)
  silkscreen extent -0.43,-0.56 0.43,0.57, body extent -0.53,-0.27 0.53,0.27, height 0.25
FP-GRM033-0_03-IPC_C#2 [mm]
  rect 0.354x0.263 smd paste+0 mask+0: 1(-0.254,0) ""(0.254,0)
  silkscreen extent -0.43,-0.56 0.43,0.56, body extent -0.53,-0.27 0.53,0.27, height 0.25
FP-RN73R2B-IPC_A [mm]
  rect 1.355x1.906 smd paste+0 mask+0: 1(-1.575,0) 2(1.575,0)
  silkscreen extent -0.6,-0.95 0.6,0.95, body extent -2.75,-1.45 2.75,1.45, height 0.25
FP-RN731J-MFG [mm]
  rect 1x0.9 smd paste+0 mask+0: 1(-0.9,0) 2(0.9,0)
  silkscreen extent -0.78,-0.82 0.78,0.82, body extent -1.5,-0.55 1.5,0.55, height 0.25
FP-RQ731J-IPC_C [mm]
  rect 0.71x0.812 smd paste+0 mask+0: 1(-0.626,0) 2(0.626,0)
  silkscreen extent -0.98,-0.85 0.98,0.85, body extent -1.08,-0.55 1.08,0.55, height 0.25
FP-SOT-223-0046067_14-MFG [mm]
  rect 1.5x1.2 smd paste+0 mask+0: 1(-3.2,2.3) 2(-3.2,0) 3(-3.2,-2.3)
  rect 1.5x3.3 smd paste+0 mask+0: 4(3.2,0)
  silkscreen extent -4.83,-3.35 1.85,3.35, body extent -4.05,-3.45 4.05,3.45, height 0.25
STM-LQFP64_L [mm] "QFP, 64-Leads, Body 10x10mm, Pitch 0.5mm, IPC High Density"
  oval 1.6x0.3 smd: 1(-5.8,3.75) 2(-5.8,3.25) 3(-5.8,2.75) 4(-5.8,2.25) 5(-5.8,1.75) 6(-5.8,1.25) 7(-5.8,0.75) 8(-5.8,0.25) 9(-5.8,-0.25) 10(-5.8,-0.75) 11(-5.8,-1.25) 12(-5.8,-1.75) 13(-5.8,-2.25) 14(-5.8,-2.75) 15(-5.8,-3.25) 16(-5.8,-3.75) 33(5.8,-3.75) 34(5.8,-3.25) 35(5.8,-2.75) 36(5.8,-2.25) 37(5.8,-1.75) 38(5.8,-1.25) 39(5.8,-0.75) 40(5.8,-0.25) 41(5.8,0.25) 42(5.8,0.75) 43(5.8,1.25) 44(5.8,1.75) 45(5.8,2.25) 46(5.8,2.75) 47(5.8,3.25) 48(5.8,3.75)
  oval 0.3x1.6 smd: 17(-3.75,-5.8) 18(-3.25,-5.8) 19(-2.75,-5.8) 20(-2.25,-5.8) 21(-1.75,-5.8) 22(-1.25,-5.8) 23(-0.75,-5.8) 24(-0.25,-5.8) 25(0.25,-5.8) 26(0.75,-5.8) 27(1.25,-5.8) 28(1.75,-5.8) 29(2.25,-5.8) 30(2.75,-5.8) 31(3.25,-5.8) 32(3.75,-5.8) 49(3.75,5.8) 50(3.25,5.8) 51(2.75,5.8) 52(2.25,5.8) 53(1.75,5.8) 54(1.25,5.8) 55(0.75,5.8) 56(0.25,5.8) 57(-0.25,5.8) 58(-0.75,5.8) 59(-1.25,5.8) 60(-1.75,5.8) 61(-2.25,5.8) 62(-2.75,5.8) 63(-3.25,5.8) 64(-3.75,5.8)
  silkscreen extent -5.92,-4.6 4.6,4.6, body extent -5,-5 5,5, height 1.6
"TIM 3.5SM SINGLE_TRP" [mil]
  rect 63x41 smd paste+0 mask+0: 1(-339,352.52) 2(-339,252.52) 7(-339,-247.48) 8(-339,-347.48) 9(339,-350) 10(339,-250) 16(339,350)
  silkscreen extent -289,-484 289,484

## Part data
C1 C19 C20 C22 C23 C24: library part CMP-1038-02198-3, "CAP CER 10UF 10V X7R 1210", Capacitance=10uF, Case Code (Imperial)=1210, Case Code (Metric)=3225, Dielectric=X7R, Max Operating Temperature=125°C, Min Operating Temperature=-55°C, Package Quantity=1, Tolerance=10%, Voltage=10V, Case/Package=1210, Construction=Flat, Depth=2.5mm, Dissipation Factor=5%, Height=2.79mm, Lead Free="Lead Free", Length=3.2mm, Mount="Surface Mount", Packaging="Tape and Reel", Radiation Hardening=No, REACH SVHC="No SVHC", RoHS Compliant=Yes, Series=1210, Termination=SMD/SMT, Thickness=0.11inch, Voltage Rating=10V, Voltage Rating (DC)=10V, Width=0.098inch
C2 C13: library part CMP-2006-04292-1, Manufacturer="AVX Interconnect / Elco", Part Number=06035A300JAT2A
C3 C4 C5 C6 C7 C8 C9 C10 C11 C12 C14 C16 C18 C21 C25 C26: library part CMP-2010-01264-2, "Chip Multilayer Ceramic Capacitors for General Purpose, 0201, 0.10uF, X5R, 15%, 10%, 10V", Capacitance=100nF, Case Code (Imperial)=0201, Case Code (Metric)=0603, Dielectric=X5R, Max Operating Temperature=85°C, Min Operating Temperature=-55°C, Package Quantity=1, Tolerance=10%, Voltage=10V, Case/Package=0201, Depth=0.3mm, Height=0.3mm, Lead Free="Lead Free", Length=0.6mm, Mount="Surface Mount", Packaging="Tape and Reel", Radiation Hardening=No, REACH SVHC="No SVHC", Termination=SMD/SMT, Thickness=0.013inch, Voltage Rating=10V, Voltage Rating (DC)=10V, Weight=6E-06oz, Width=0.012inch
C15: library part CMP-2007-04663-1, Manufacturer="AVX Interconnect / Elco", Part Number=0805YD105MAT2A
C17: library part CMP-03422-000187-1, "CC0603 2.2 uF X5R 10.00% 16 V", Capacitance="2.2 uF", Manufacturer=YAGEO, Package=CC0603-DA, Temperature="-55°C to +125°C", Temperature Characteristic=X5R, Temperature Coefficient=15%, Temperature Range High=+125°C, Temperature Range Low=-55°C, Tolerance=0.1, Voltage="16 V", Automotive=No, Category=Cap, ComponentLink2Description=Datasheet, ComponentLink2URL=http://www.yageo.com/documents/recent/UPY-GPHC_X7R_6.3V-to-50V_18.pdf, Device Class L1="Passive Components", Device Class L2=Capacitors, Device Class L3="Ceramic Capacitors", Footprint Url=http://www.yageo.com/exep/pages/download/literatures/UPY-C_GEN_24.pdf, Height=0.9mm, Lead Free=Yes, Manufacturer Part Number=CC0603KPX5R7BB225, Material=Ceramic, Octopart=https://octopart.com/cc0603kpx5r7bb225-yageo-91091799, RoHS=TRUE, Voltage Rating="16 V"
D1: library part CMP-44529-000064-1, "LED YELLOW CLEAR CHIP SMD", Case Code (Imperial)=0805, Case Code (Metric)=2012, Color=Yellow, Forward Current=20mA, Forward Voltage=2V, Illumination Color=Green, Lens Color=Clear, Max Operating Temperature=85°C, Min Operating Temperature=-40°C, Package Quantity=2000, Case/Package=0805, Dominant Wavelength=590nm, Height=0.4mm, Lead Free="Lead Free", Length=2mm, Lens Style=Clear, Luminous Intensity=150mcd, Mount="Surface Mount", Number of LEDs=1, Number of Pins=2, Packaging="Tape and Reel", RoHS Compliant=Yes, Series=APHCM, Test Current=20mA, Viewing Angle=110°, Wavelength=590nm, Width=1.25mm
D2: library part CMP-44529-000045-1, "LED GREEN CLEAR 1608 SMD", Case Code (Imperial)=0603, Case Code (Metric)=1608, Color=Green, Forward Voltage=2.65V, Lens Color=Colorless, Test Current=2mA, Case/Package=0603, Dominant Wavelength=525nm, Height=0.75mm, Length=1.6mm, Lens Size=0.7mm, Lens Style=Round, Lens Transparency=Clear, Luminous Intensity=180mcd, Mount="Surface Mount", Packaging="Tape and Reel", Viewing Angle=100°, Width=0.8mm
F1: library part CMP-08606-000003-1, "PTC RESET FUSE 16V 750MA 1206", Current Rating=100A, Hold Current=0.75A, Manufacturer="Littelfuse Inc", Package=1206L, Resistance=0.09-0.29Ω, Temperature="-40°C to +85°C", Temperature Range High=+85°C, Temperature Range Low=-40°C, Trip Current=1.5A, Voltage Rating=16V, Automotive=No, Category=Fuse, ComponentLink2Description=Datasheet, ComponentLink2URL=https://www.littelfuse.com/~/media/electronics/datasheets/resettable_ptcs/littelfuse_ptc_1206l_datasheet.pdf.pdf, Device Class L1="Circuit Protection", Device Class L2="PTC Resettable Fuses", Device Class L3=unset, Digikey Description="PTC RESET FUSE 16V 750MA 1206", Height=1.25mm, Lead Free=Yes, Manufacturer Part Number=1206L075/16WR, Mouser Description="Resettable Fuses - PPTC 16V 0.75A 1206 PTC", Octopart=https://octopart.com/1206l075%2F16wr-littelfuse-28867102, RoHS=TRUE, Trip Time=0.2s
FB1: library part CMP-06046-002018-1, "Ferrite Bead, 0201, 75Ω @ 100MHz, 25%, 1Ω, 200mA", Case/Package=0201, DC Resistance (DCR)=1R, Max Current Rating=200mA, Max Operating Temperature=125°C, Min Operating Temperature=-55°C, Ratings=AEC-Q200, Mount="Surface Mount", Number of Lines=1, RoHS Compliant=Yes
J1 J2 J3 J4 J5 J7 J8 J9 J10 J11: Package=None, Availability=Unavailable, MP=348250240, Price=None
J6: library part CMP-17439-000399-1, "CONN HEADER VERT 16POS 2MM", Color=Natural, Contact Resistance=20mR, Current Rating=3A, Flammability Rating="UL94 V-0", Housing Color=Beige, Max Operating Temperature=85°C, Max Voltage Rating (AC)=250V, Min Operating Temperature=-25°C, Connector Type=Header, Contact Finish - Mating=TIN, Contact Material="Copper Alloy", Contact Mating Length=0.114inch, Contact Plating=Copper, Contact Shape=Square, Contact Type="Male Pin", Depth=5mm, Fastening Type=Detent, Gender=Male, Height=9.5mm, Housing Material=Polyamide, Insulation Color=Natural, Insulation Material=Nylon, Lead Free="Lead Free", Length=17.9mm, Mated Stacking Heights=8.8mm, Max Current Rating=3A, Mount="Through Hole", Number of Contacts=16, Number of Positions=16, Number of Rows=2, Orientation=Straight, Packaging=Bulk, Pitch=2mm, Row Spacing=0.079inch, Series=PHD, Termination=Solder, Voltage Rating=250V, Width=5mm
J12: library part CMP-17439-000382-1, "CONN HEADER VERT 5POS 2.5MM", Color=Natural, Current Rating=3A, Flammability Rating="UL94 V-0", Housing Color=White, Voltage Rating=250V, Connector Type=Header, Contact Finish - Mating=TIN, Contact Material=Brass, Contact Mating Length=0.13inch, Contact Plating=Tin, Contact Shape=Square, Contact Type="Male Pin", Fastening Type=Friction, Gender=Male, Insulation Color=Natural, Insulation Material=Nylon, Lead Free="Lead Free", Mated Stacking Heights=8.1mm, Mount="Through Hole", Number of Contacts=5, Number of Positions=5, Number of Rows=1, Orientation=Straight, Packaging=Bulk, Pitch=2.5mm, Series=EH, Termination=Solder
PS1 PS2: "0.5A DC/DC-Converter 'INNOLINE' SIP3 reg", Package="SIP-3 Recom Power", Check_prices=https://www.snapeda.com/parts/R-78E3.3-0.5/Recom+Power/view-part/?ref=eda, Digi-Key_Part_Number=945-1661-5-ND, MF="Recom Power", MP=R-78E3.3-0.5, Purchase-URL=https://pricing.snapeda.com/search/part/R-78E3.3-0.5/?ref=eda, SnapEDA_Link=https://www.snapeda.com/parts/R-78E3.3-0.5/Recom+Power/view-part/?ref=snap
R1 R2 R3 R4 R5 R6 R7 R8 R9 R10 R11 R12 R13 R14 R15 R16 R17 R18 R19 R20 R21 R22 R23 R24 R25 R26 R27 R28 R29 R30 R31 R32 R33 R34 R35 R36 R37 R38 R39 R40 R41 R42 R43 R44 R45 R46 R47 R48 R49 R50 R51 R52 R53 R54 R55 R56 R57 R58 R59 R60 R61 R62 R63 R64 R65 R66 R67 R68 R69 R70 R71 R72 R73 R74 R75 R76 R77 R78 R79 R80 R81 R82 R83 R84 R85 R86 R87 R88 R89 R90 R91 R92 R93 R94 R95 R96 R97 R98 R99 R100 R101 R102 R103 R104 R105 R106 R107 R108 R109 R110 R111 R112 R113 R114 R115 R116 R117 R118 R119 R120: library part CMP-04015-056270-1, "3kΩ ±0.1% 0.25W, 1/4W Chip Resistor 1206 (3216 Metric) Moisture Resistant Thin Film"
R121: library part CMP-03211-001316-1, "RQ73 0603 100KΩ  0.15W 10ppm/°C 0.1% 75V", Manufacturer=TE, Package=RQ731J, Power Rating=0.15W, Resistance=100KΩ, Temperature="-55°C to +155°C", Temperature Coefficient=10ppm/°C, Temperature Range High=+155°C, Temperature Range Low=-55°C, Tolerance=0.1%, Voltage Rating=75V, Automotive=Yes, Automotive Grade="Grade 0", Category=Res, ComponentLink2Description=Datasheet, ComponentLink2URL=https://www.te.com/commerce/DocumentDelivery/DDEController?Action=showdoc&DocId=Data+Sheet%7F1773270-2%7FA%7Fpdf%7FEnglish%7FENG_DS_1773270-2_A.pdf%7F4-2176362-2, Composition="Thin Film", Device Class L1="Passive Components", Device Class L2=Resistors, Device Class L3="Chip SMD Resistors", Height=0.6mm, Ipc Land Pattern Name=RESC15580X45, Lead Free=Yes, Manufacturer Part Number=RQ73C1J100KBTD, Octopart=https://octopart.com/rq73c1j100kbtd-te+connectivity-93908182, RoHS=TRUE, Series=RQ73
R122 R123: library part CMP-00287-116338145-1, "ERJH3GJ331V Res 330 Ohm 5% 1/8W 0603", NexarPartId=116338145
R124: library part CMP-03211-006130-1, "Thin Film Resistors RN 0603 10KΩ 0.1% 10ppm/°C", Manufacturer="TE Connectivity", Package=RN731J, Power Rating=0.063W, Resistance=10KΩ, Temperature="-55°C to +155°C", Temperature Coefficient=10ppm/°C, Temperature Range High=+155°C, Temperature Range Low=-55°C, Tolerance=0.1%, Voltage Rating=50V, Automotive=No, Category=Res, ComponentLink2Description=Datasheet, ComponentLink2URL=https://www.te.com/commerce/DocumentDelivery/DDEController?Action=showdoc&DocId=Data+Sheet%7F1773270%7FP%7Fpdf%7FEnglish%7FENG_DS_1773270_P.pdf%7F9-1614352-9, Composition="Thin Film", Device Class L1="Passive Components", Device Class L2=Resistors, Device Class L3="Chip SMD Resistors", Height=0.55mm, Ipc Land Pattern Name=RESC15580X45, Lead Free=Yes, Manufacturer Part Number=RN73C1J10KB, Octopart=https://octopart.com/rn73c1j10kb-te+connectivity-47108040, octopart_url=https://octopart.com/rn73c1j10kb-te+connectivity-47108040, RoHS=TRUE, Series=RN73
SW1: library part CMP-03407-000026-1, "SWITCH TACTILE SPST-NO 0.05A 24V", RoHS Compliant=Yes
U1 U2 U3 U4 U5 U11 U12 U13 U14 U15: library part CMP-04892-000038-1, "IC MUX/DEMUX 1X16 24SSOP", Case/Package=SSOP, High Level Output Current=25mA, Max Operating Temperature=125°C, Max Supply Current=8uA, Max Supply Voltage=6V, Min Operating Temperature=-55°C, Min Supply Voltage=2V, On-State Resistance=160R, Package Quantity=2000, Bandwidth=89MHz, Contact Plating=Gold, Height=1.95mm, Lead Free="Lead Free", Length=8.2mm, Logic Function=Multiplexer, Low Level Output Current=25mA, Max Output Current=25mA, Mount="Surface Mount", Number of Bits=16, Number of Channels=1, Number of Circuits=16, Number of Inputs=16, Number of Outputs=1, Number of Pins=24, Operating Supply Current=8uA, Packaging="Tape and Reel", Polarity=Non-Inverting, Propagation Delay=75ns, Radiation Hardening=No, REACH SVHC="No SVHC", Series=74HC, Supply Type=Single, Termination=SMD/SMT, Turn-Off Delay Time=290ns, Turn-On Delay Time=300ns, Weight=0.006081oz, Width=5.3mm
U6: library part CMP-01539-89931857-1, "TIM 3.5-0911SM 3.5 Watt DC/DC converter, medical, 4: 1 input, 5000 VAC I/O-isolation (2 x MOPP), low leakage current, encapsulated,...", Output Power=3.5W, Height=10.5mm, NexarPartId=89931857, Number of Outputs=1, RoHS=Compliant, Width=14.4mm
U7: library part CMP-04872-000178-1, "IC TRANSCEIVER 1/1 SOT23-8", Case/Package=SOT-23-8, Max Operating Temperature=125°C, Min Operating Temperature=-40°C, Data Rate=1Mbps, Lead Free="Lead Free", Mount="Surface Mount", Packaging="Tape and Reel", RoHS Compliant=Yes
U9: library part CMP-04872-000209-1, "DGTL ISO 5700VRMS 4CH GP 16SOIC", Case/Package=SOIC, Isolated Power=No, Max Operating Temperature=125°C, Max Supply Voltage=5.5V, Min Operating Temperature=-55°C, Min Supply Voltage=2.25V, Channel Type=Unidirectional, Data Rate=100Mbps, Lead Free="Lead Free", Number of Channels=4, Number of Pins=16, Packaging=Rail/Tube, Propagation Delay=16ns, Pulse Width Distortion (PWD)=4.1ns, REACH SVHC="No SVHC", RoHS Compliant=Yes, Type="General Purpose"
U10: library part CMP-0243-00218-1, "ARM Cortex-M4 32-bit MCU+FPU, 512 KB Flash, 128 KB Internal RAM, 50 I/Os, 64-Pin LQFP, -40 to 85 degC, Tray", I/Os (High Current)=50, Operating Frequency(F) (Processor speed) (MHz)=180, Package Description=LQFP64, Package Reference="64-Pin Low-profile Quad Flat Package, Body 10 x 10 mm, Pitch 0.5 mm", Supply Voltage(Vcc) min (V)=1.7, ComponentLink1Description="Manufacturer URL", ComponentLink1URL=http://www.st.com/, ComponentLink2Description=Datasheet, ComponentLink2URL=http://www.st.com/st-web-ui/static/active/en/resource/technical/document/datasheet/DM00141306.pdf, Core="ARM Cortex-M4", D/A Converter=2, DatasheetVersion="Rev. 6", FLASH Size (Prog) (kB)=512, Internal RAM Size (kB)=128, Mounting Technology="Surface Mount", Packing=Tray
U16: library part CMP-0244-00307-2, "IC REG LINEAR 3.3V 800MA SOT223", Case/Package=SOT-223, Dropout Voltage=1.1V, Input Bias Current=5mA, Max Input Voltage=15V, Max Operating Temperature=125°C, Max Output Current=1.3A, Max Output Voltage=3.3V, Max Power Dissipation=12W, Min Input Voltage=5.3V, Min Operating Temperature=-40°C, Output Current=950mA, Output Voltage Accuracy=1%, Package Quantity=1, Quiescent Current=10mA, Accuracy=1%, Contact Plating=Tin, Height=1.8mm, Lead Free="Lead Free", Length=6.5mm, Max Supply Voltage=15V, Min Output Voltage=3.3V, Min Supply Voltage=3.3V, Mount="Surface Mount", Nominal Output Voltage=3.3V, Number of Outputs=1, Number of Pins=4, Number of Regulators=1, Number of Terminals=4, Output Type=Fixed, Output Voltage=3.3V, Packaging="Tape and Reel", Polarity=Positive, Power Dissipation=12W, Radiation Hardening=No, REACH SVHC="No SVHC", Termination=SMD/SMT, Weight=0.01lb, Width=3.5mm
Y1: library part CMP-27762-009874-1, "CRYSTAL 8.0000MHZ 18PF SMD", Case/Package=SMD/SMT, ESR (Equivalent Series Resistance)=80R, Frequency=8MHz, Frequency Stability=50ppm, Frequency Tolerance=20ppm, Load Capacitance=18pF, Max Operating Temperature=70°C, Min Operating Temperature=-20°C, Operating Frequency="8 MHz", Package Quantity=1000, Accuracy=20ppm, Contact Plating=Tin, Depth=4.7mm, Height=0.165inch, Lead Free="Lead Free", Length=11.4mm, Mount="Surface Mount", Number of Pins=2, Packaging="Tape and Reel", Radiation Hardening=No, REACH SVHC="No SVHC", Series=ABLS, Series Resistance=80R, Termination=SMD/SMT, Tolerance=20ppm, Width=4.7mm

## Free pads (board coordinates)
  round 1.524 hole 4: 9(3.81,3.556) 9(233.675,85.136) 9(233.68,4.318)

## Via types
v1: diameter 1.27, hole 0.711, Top Layer to Bottom Layer, 247 vias
v2: diameter 0.711, hole 0.711, Top Layer to Bottom Layer, 6 vias

## Nets (pads, with @x,y where several pads share a name; then routed paths per layer and width w, separated by ;. In a path a pad name is that pad's centre, name@x,y a point inside that pad or via, vN(x,y) a via of type N, cw(c..) or ccw(c..) an arc to the next point about the centre after c; other vN are vias at no path point)
GND: C3.2 C4.2 C5.2 C6.2 C7.2 C8.2 C9.2 C11.2 C12.2 J1.2 J1.4 J1.6 J1.8 J1.10 J1.12 J1.14 J1.16 J1.18 J1.20 J1.22 J1.24 J2.2 J2.4 J2.6 J2.8 J2.10 J2.12 J2.14 J2.16 J2.18 J2.20 J2.22 J2.24 J3.2 J3.4 J3.6 J3.8 J3.10 J3.12 J3.14 J3.16 J3.18 J3.20 J3.22 J3.24 J4.2 J4.4 J4.6 J4.8 J4.10 J4.12 J4.14 J4.16 J4.18 J4.20 J4.22 J4.24 J5.2 J5.4 J5.6 J5.8 J5.10 J5.12 J5.14 J5.16 J5.18 J5.20 J5.22 J5.24 J7.2 J7.4 J7.6 J7.8 J7.10 J7.12 J7.14 J7.16 J7.18 J7.20 J7.22 J7.24 J8.2 J8.4 J8.6 J8.8 J8.10 J8.12 J8.14 J8.16 J8.18 J8.20 J8.22 J8.24 J9.2 J9.4 J9.6 J9.8 J9.10 J9.12 J9.14 J9.16 J9.18 J9.20 J9.22 J9.24 J10.2 J10.4 J10.6 J10.8 J10.10 J10.12 J10.14 J10.16 J10.18 J10.20 J10.22 J10.24 J11.2 J11.4 J11.6 J11.8 J11.10 J11.12 J11.14 J11.16 J11.18 J11.20 J11.22 J11.24 U1.12 U1.15 U2.12 U2.15 U3.12 U3.15 U4.12 U4.15 U5.12 U5.15 U11.12 U11.15 U12.12 U12.15 U13.12 U13.15 U14.12 U14.15 U15.12 U15.15 | length 652.2
  Top Layer w0.254: v2(19.05,61.087) 19.685,60.452 19.917,60.452 20.052,60.587 20.263,60.587 C12.2@20.271,60.579 ; v1(19.624,30.723) U1.15@21.263,30.723 ; v1(21.209,50.546) 21.209,50.605 21.898,51.294 U15.12@21.898,52.432 ; U1.12@28.013,32.023 30.537,32.023 31.026,32.512 33.062,32.512 35.144,30.43 35.168,30.43 v1@35.645,29.952 ; U15.15@28.648,53.732 28.654,53.727 32.76,53.727 v1(32.766,53.721) ; C3.2@35.433,30.988 35.433,30.942 35.676,30.699 35.676,29.983 v1(35.814,29.845) ; C11.2@54.61,61.01 54.61,61.214 54.737,61.341 v2(54.737,62.738) ; v1(55.068,30.353) 55.179,30.464 56.084,30.464 56.47,30.85 U2.15@58.855,30.85 ; v2(57.544,52.972) 57.668,52.972 57.89,53.194 U14.12@59.703,53.194 ; U14.15@66.454,54.494 69.458,54.494 71.815,52.137 72.323,52.137 v1(72.517,51.943) ; v1@71.783,33.045 v1(71.783,33.205) ; v1@71.897,33.16 71.977,33.24 72.405,33.24 72.44,33.274 ; v1@71.977,33.274 72.44,33.274 ; C4.2@77.216,29.083 77.22,29.133 77.212,29.133 77.212,30.357 74.295,33.274 74.278,33.274 72.44,33.274 ; v1(90.17,23.368) C5.2@90.17,24.892 ; J9.14@96.241,81.686 J9.14@96.241,81.864 ; v1(99.507,30.215) U3.15@101.146,30.215 ; U13.12@102.416,53.575 104.227,53.575 104.627,53.975 v1(104.902,53.975) ; U3.12@107.896,31.515 110.316,31.515 110.465,31.664 110.465,31.902 v1(108.331,34.036) ; U13.15@109.166,54.875 v1@111.38,54.875 ; v1(111.989,30.353) v1@112.395,30.353 ; v1(118.44,60.63) 124.195,54.875 ; U4.15@131.499,32.12 131.493,32.126 129.893,32.126 129.887,32.131 129.881,32.131 128.853,31.103 126.26,31.103 107.315,50.048 107.315,50.81 107.559,51.054 110.911,51.054 111.836,51.979 111.836,54.419 v1@111.38,54.875 ; C9.2@137.668,61.517 137.668,61.595 137.69,61.617 137.69,61.827 137.668,61.849 v2(137.668,62.738) ; U4.12@138.249,33.42 139.398,33.42 v1(139.398,34.315) v1(139.395,34.315) ; U12.12@139.627,53.829 v1(141.265,53.829) 140.776,53.34 125.73,53.34 124.195,54.875 ; v1(145.669,33.782) 145.792,33.659 145.792,31.5 C6.2@145.796,31.496 ; v1(175.895,53.721) 178.278,53.721 178.868,54.311 U11.12@179.578,54.311 ; v2(175.92,60.071) 175.92,60.195 176.149,60.423 C8.2@176.149,60.947 ; v1(178.689,31.877) 178.774,31.962 180.617,31.962 U5.15@180.648,31.993 ; U11.15@186.328,55.611 v1(189.636,55.611) ; U5.12@187.398,33.293 188.067,33.293 188.733,33.958 189.025,33.958 v1(189.992,34.925) 191.897,34.925 194.056,32.766 C7.2@194.056,31.037 ; v1@111.38,54.875 v1(111.836,54.875) 124.195,54.875
  Layer 1 w0.254: J11.12@15.113,81.991 J11.2@15.113,84.201 ; J11.14@19.101,81.991 J11.4@19.101,84.201 ; v1(21.209,50.546) 21.403,50.74 22.211,50.74 23.563,52.093 23.563,53.448 24.979,54.864 31.411,54.864 32.554,53.721 v1(32.766,53.721) ; J11.22@35.103,81.991 J11.8@35.103,84.201 ; J2.10@53.035,5.918 J2.24@53.035,8.128 ; J10.12@54.051,81.991 J10.2@54.051,84.201 ; J2.8@57.048,5.918 J2.22@57.048,8.128 ; J10.14@58.039,81.991 J10.4@58.039,84.201 ; v1(71.783,33.205) 71.852,33.274 73.518,33.274 ; v1(72.517,51.943) 72.339,51.765 72.339,35.484 73.518,34.305 73.518,33.274 ; J2.4@73.05,5.918 73.05,8.128 73.05,16.344 73.66,16.953 73.66,24.805 73.518,24.947 73.518,33.274 ; J10.22@74.041,81.991 J10.8@74.041,84.201 ; J2.2@77.038,5.918 J2.12@77.038,8.128 ; J10.24@78.054,81.991 J10.10@78.054,84.201 ; J9.12@92.253,81.864 J9.2@92.253,84.074 ; J9.14@96.241,81.864 J9.4@96.241,84.074 ; v1(99.507,30.215) 100.076,29.646 ; J9.20@108.255,81.864 J9.6@108.255,84.074 ; v1(108.331,34.036) 108.331,37.034 106.249,39.116 99.572,39.116 98.679,40.009 98.679,41.271 104.801,47.393 108.158,50.751 108.158,51.197 v1(111.836,54.875) ; J3.4@112.09,5.918 112.09,8.128 113.081,9.119 v1(113.081,13.36) ; J9.22@112.243,81.864 J9.8@112.243,84.074 ; v1(126.009,14.376) 130.251,10.135 J4.24@130.251,8.128 J4.10@130.251,5.918 ; J8.12@130.912,81.864 J8.2@130.912,84.074 ; J4.8@134.264,5.918 J4.22@134.264,8.128 ; J8.14@134.899,81.864 J8.4@134.899,84.074 ; v1(145.669,33.782) 161.112,49.225 180.442,49.225 181.508,50.292 181.508,55.691 184.694,58.877 195.478,58.877 201.549,64.948 201.549,78.918 194.818,85.649 181.813,85.649 J7.16@178.029,81.864 ; J4.4@150.266,5.918 J4.14@150.266,8.128 ; J8.22@150.901,81.864 J8.8@150.901,84.074 ; J4.2@154.254,5.918 J4.12@154.254,8.128 ; J5.10@169.215,6.172 J5.24@169.215,8.382 ; J7.12@170.028,81.864 J7.2@170.028,84.074 ; J5.8@173.228,6.172 J5.22@173.228,8.382 ; J7.14@174.015,81.864 J7.4@174.015,84.074 ; J5.6@177.216,6.172 J5.20@177.216,8.382 ; J7.22@190.017,81.864 J7.8@190.017,84.074 ; J5.2@193.218,6.172 J5.12@193.218,8.382
  Layer 2 w0.254: v1@32.766,53.52 v1(32.766,53.721) ; v1(35.814,29.845) 54.285,29.845 54.793,30.353 v1(55.068,30.353) ; v1@51.742,51.89 v1(51.816,51.816) ; v1@51.89,51.89 60.78,51.89 61.366,52.476 62.575,52.476 63.17,51.881 63.17,50.448 63.319,50.299 70.927,50.299 72.517,51.889 v1(72.517,51.943) ; v1(104.902,53.975) 106.708,52.169 107.614,52.169 109.042,53.598 109.042,53.639 110.278,54.875 v1(111.836,54.875) ; v1(111.989,30.353) 111.989,28.956 113.233,27.711 120.904,27.711 122.707,25.908 122.707,22.403 120.599,20.295
  Bottom Layer w0.254: J3.10@92.227,5.715 J3.24@92.227,7.925 ; J9.12@92.253,81.864 93.726,80.391 93.726,79.756 ; J3.8@96.088,5.918 96.241,5.918 J3.8@96.241,5.715 J3.22@96.241,7.925 ; J9.14@96.241,81.686 97.409,80.518 ; v1(99.507,30.215) 103.328,34.036 v1(108.331,34.036) ; 99.695,44.323 99.797,44.221 130.048,44.221 130.632,44.806 130.632,51.486 ; 113.157,33.02 113.919,33.782 118.364,33.782 118.551,33.595 119.313,33.595 ; J3.2@116.23,5.715 J3.12@116.23,7.925 ; v1(126.009,14.376) 126.009,28.253 129.887,32.131 137.211,32.131 v1(139.395,34.315) ; 188.849,56.972 192.583,56.972 194.031,58.42 J7.24@194.031,81.864
  other v1: 120.04,62.078
NetC1_1: C1.1 C23.1 F1.2 PS1.1 U6.16 | length 62
  Top Layer w0.254: U6.16@218.694,25.171 218.694,26.34 219.024,26.67 v1(223.52,26.67) 223.665,26.815 224.303,26.815 224.795,27.307 224.795,32.046 225.018,32.269 226.334,32.269 226.557,32.046 226.557,29.577 226.706,29.428 226.916,29.428 227.761,30.273 228.103,30.273 228.476,30.646 F1.2@228.476,30.988 ; C1.1@229.388,62.357 229.388,58.598 229.261,58.471 C23.1@229.261,54.737 229.261,51.627 PS1.1@234.315,46.573
  Layer 1 w0.254: v1(223.52,26.67) 234.315,37.465 PS1.1@234.315,46.573
NetC2_1: C2.1 U10.5 Y1.2 | length 25.1
  Top Layer w0.254: Y1.2@67.818,47.041 v1(67.818,49.283) ; C2.1@74.168,48.753 75.829,48.753 ; v1(76.248,49.401) 76.248,49.172 75.829,48.753 ; U10.5@85.126,42.384 84.042,42.384 77.673,48.753 75.829,48.753
  Layer 2 w0.254: v1(67.818,49.283) 67.877,49.342 76.189,49.342 v1(76.248,49.401)
NetC3_1: C3.1 U1.1 U10.21 | length 83.4
  Top Layer w0.254: U1.1@28.013,24.873 28.042,24.844 29.613,24.844 29.642,24.816 29.68,24.854 32.22,24.854 v1(32.258,24.892) ; C3.1@35.433,31.496 35.643,31.496 39.497,27.642 v1(39.497,24.892) ; U10.21@89.176,34.834 89.176,35.496 89.185,35.505 89.185,36.571 v1(89.363,36.748)
  Layer 2 w0.254: v1(32.258,24.892) v1(39.497,24.892) 62.27,24.892 64.353,22.809 83.896,22.809 89.154,28.067 89.154,35.605 89.281,35.732 89.281,36.667 v1(89.363,36.748)
NetC4_1: C4.1 U2.1 U10.22 | length 30.9
  Top Layer w0.254: U2.1@65.605,25 65.686,24.92 69.441,24.92 v1(69.596,24.765) ; v1(76.073,26.543) 76.077,26.547 77.067,26.547 77.216,26.695 C4.1@77.216,28.574 86.191,28.574 89.662,32.045 89.662,34.137 89.668,34.143 89.668,34.665 U10.22@89.662,34.671
  Layer 2 w0.254: v1(69.596,24.765) 72.489,24.765 74.267,26.543 v1(76.073,26.543)
NetC5_1: C5.1 U3.1 U10.23 | length 34
  Top Layer w0.254: C5.1@90.17,25.4 90.17,26.061 90.176,26.068 v1(90.176,27.153) U10.23@90.176,34.834 ; U3.1@107.896,24.365 107.958,24.427 110.66,24.427 v1(110.744,24.511)
  Layer 2 w0.254: v1(90.176,27.153) 100.559,27.153 101.778,25.933 108.306,25.933 109.728,24.511 v1(110.744,24.511)
NetC6_1: C6.1 U4.1 U10.8 | length 177
  Top Layer w0.254: U10.8@85.126,40.884 86.924,40.884 88.956,42.916 90.083,42.916 90.64,42.358 91.431,42.358 v1(91.626,42.164) ; U4.1@138.249,26.27 138.918,26.27 138.999,26.19 139.065,26.115 139.065,26 139.134,25.931 139.134,25.647 139.305,25.647 139.679,25.273 v1(139.954,25.273) 139.954,20.89 140.78,20.064 140.78,18.646 141.256,18.17 143.478,18.17 143.701,18.393 143.701,22.887 142.244,24.344 v1(142.244,25.912) ; C6.1@145.796,30.987 145.796,30.942 147.066,29.672 v1(147.066,29.464)
  Layer 1 w0.254: v1(142.244,25.912) 145.796,29.464 v1(147.066,29.464)
  Layer 2 w0.254: v1(91.626,42.164) 91.626,40.854 92.075,40.405 92.075,39.37 91.694,38.989 88.729,38.989 88.12,38.379 85.896,38.379 84.074,36.558 84.074,36.486 83.275,35.687 76.922,35.687 74.93,33.695 74.93,32.853 75.525,32.258 76.367,32.258 78.78,34.671 83.696,34.671 86.388,37.363 88.541,37.363 89.15,37.973 91.396,37.973 94.234,35.135 94.234,28.677 95.021,27.889 99.492,27.889 99.67,28.067 103.378,28.067 104.546,26.899 107.467,26.899 108.509,27.94 108.509,30.226 109.652,31.369 128.118,31.369 129.282,30.204 129.282,29.994 129.134,29.845 114.975,29.845 114.34,30.48 113.498,30.48 112.903,29.885 112.903,29.043 113.498,28.448 114.34,28.448 114.721,28.829 130.658,28.829 132.131,27.356 132.131,25.908 132.791,25.248 139.929,25.248 v1(139.954,25.273)
NetC7_1: C7.1 U5.1 U10.9 | length 153.9
  Top Layer w0.254: v1(75.946,33.274) 76.827,34.155 80.811,34.155 81.274,34.618 81.497,34.841 81.661,35.005 81.661,39.395 82.65,40.384 U10.9@85.126,40.384 ; U5.1@187.398,26.143 189.122,26.143 v1(189.865,25.4) ; C7.1@194.056,30.479 194.056,30.434 195.707,28.783 v1(195.707,28.575)
  Layer 2 w0.254: v1(75.946,33.274) 77.851,35.179 83.485,35.179 84.582,36.276 84.582,36.347 86.106,37.871 88.33,37.871 88.94,38.481 91.607,38.481 95.003,35.085 95.003,34.969 98.4,31.572 107.304,31.572 109.768,34.036 113.578,34.036 115.229,32.385 122.836,32.385 123.817,33.367 135.983,33.367 138.481,35.865 157.524,35.865 157.549,35.839 173.337,35.839 176.156,33.02 179.44,33.02 180.035,32.425 180.035,32.182 186.817,25.4 v1(189.865,25.4) 193.04,28.575 v1(195.707,28.575)